# Altium PCB PCB.PcbDoc
Units mm, origin at the board's own origin, x right, y up, seen from the top; angles counter-clockwise.
Board outline 66.8 x 59.82 mm, 2 copper layers (Top Layer, Bottom Layer); 19 components, 17 nets, 137 pads, 32 vias.
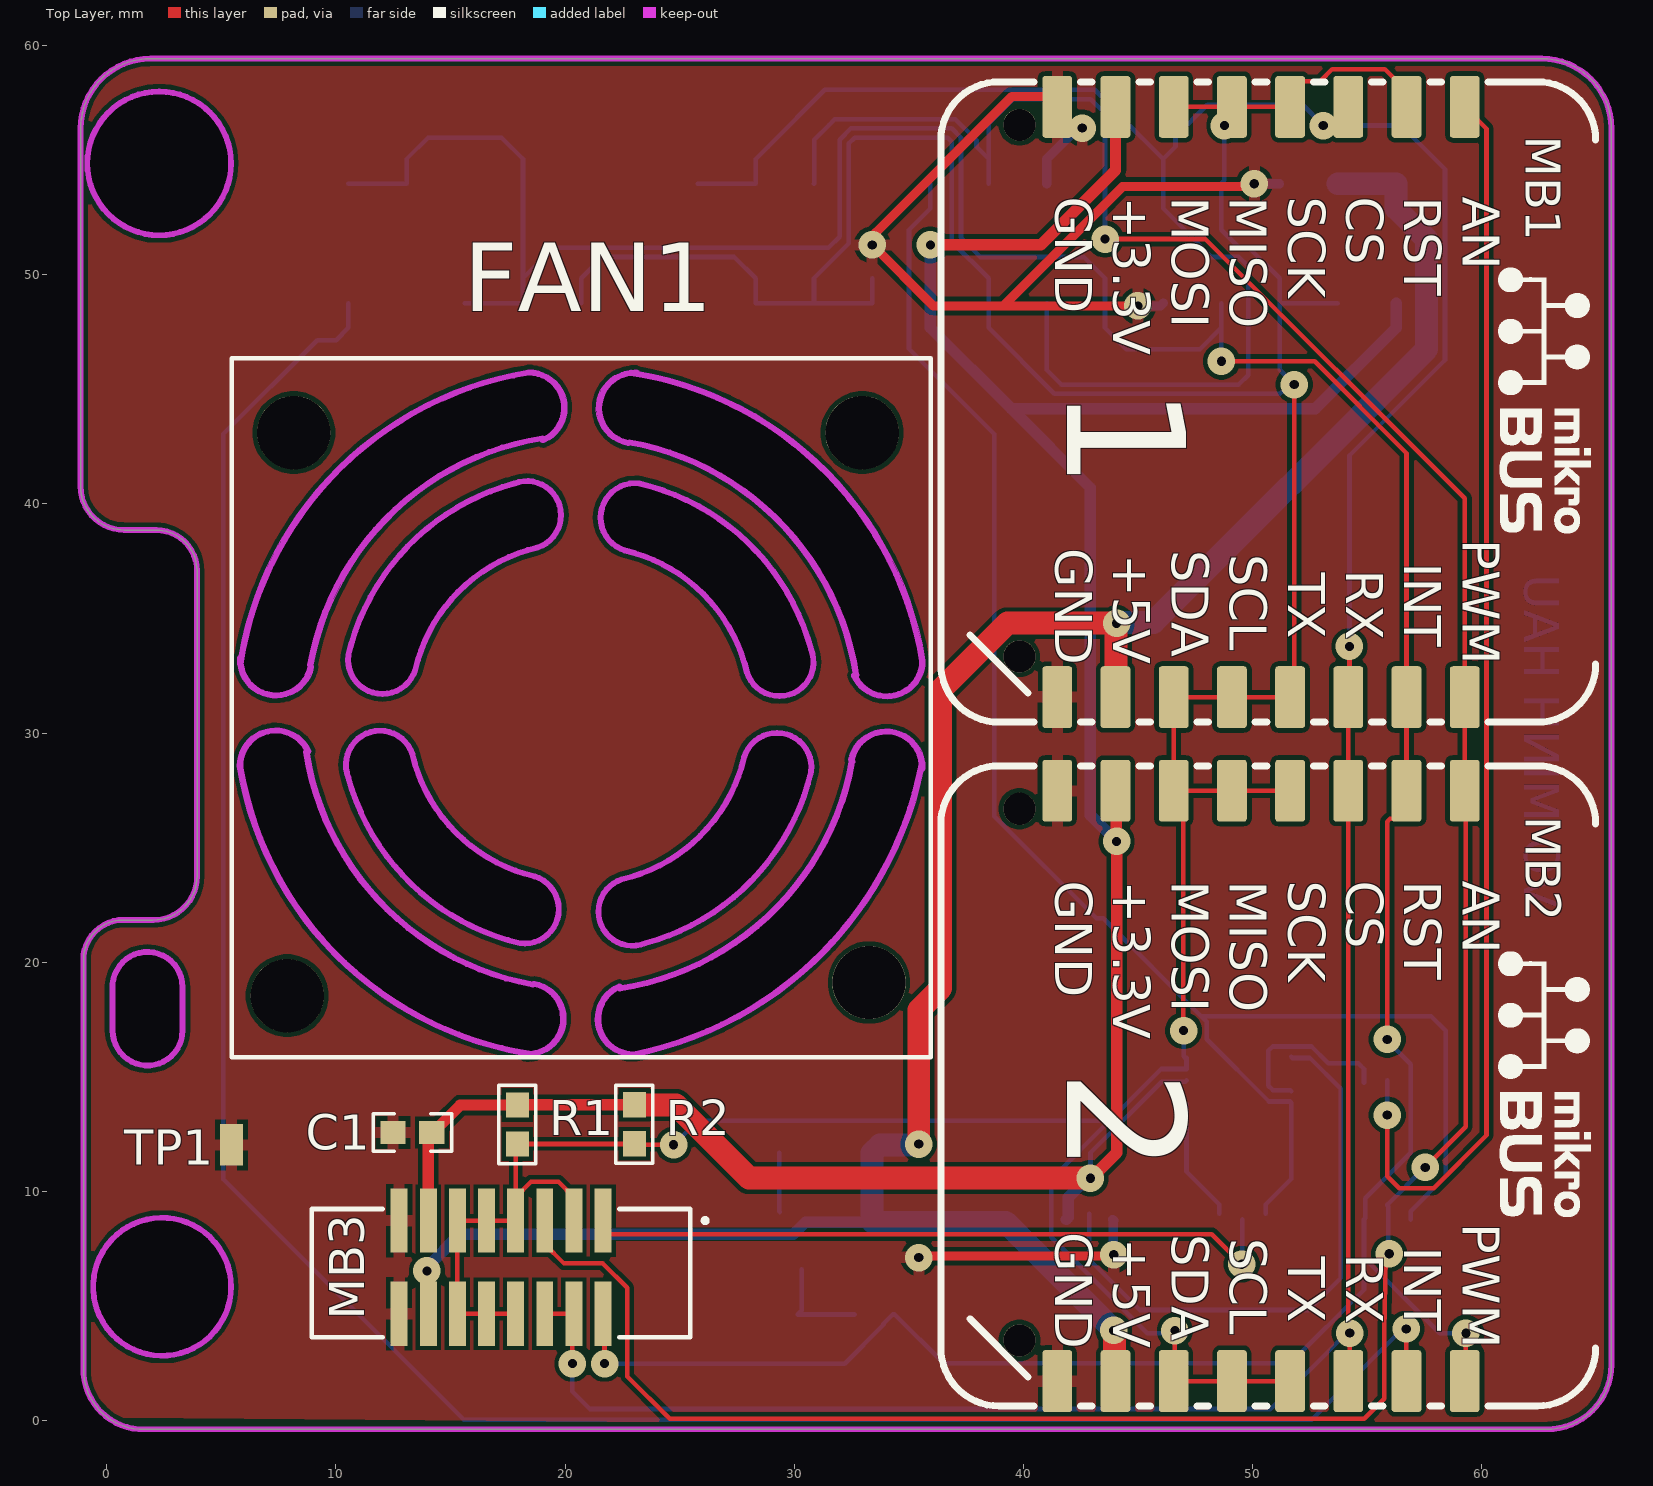
[diagram p0: Top Layer view]
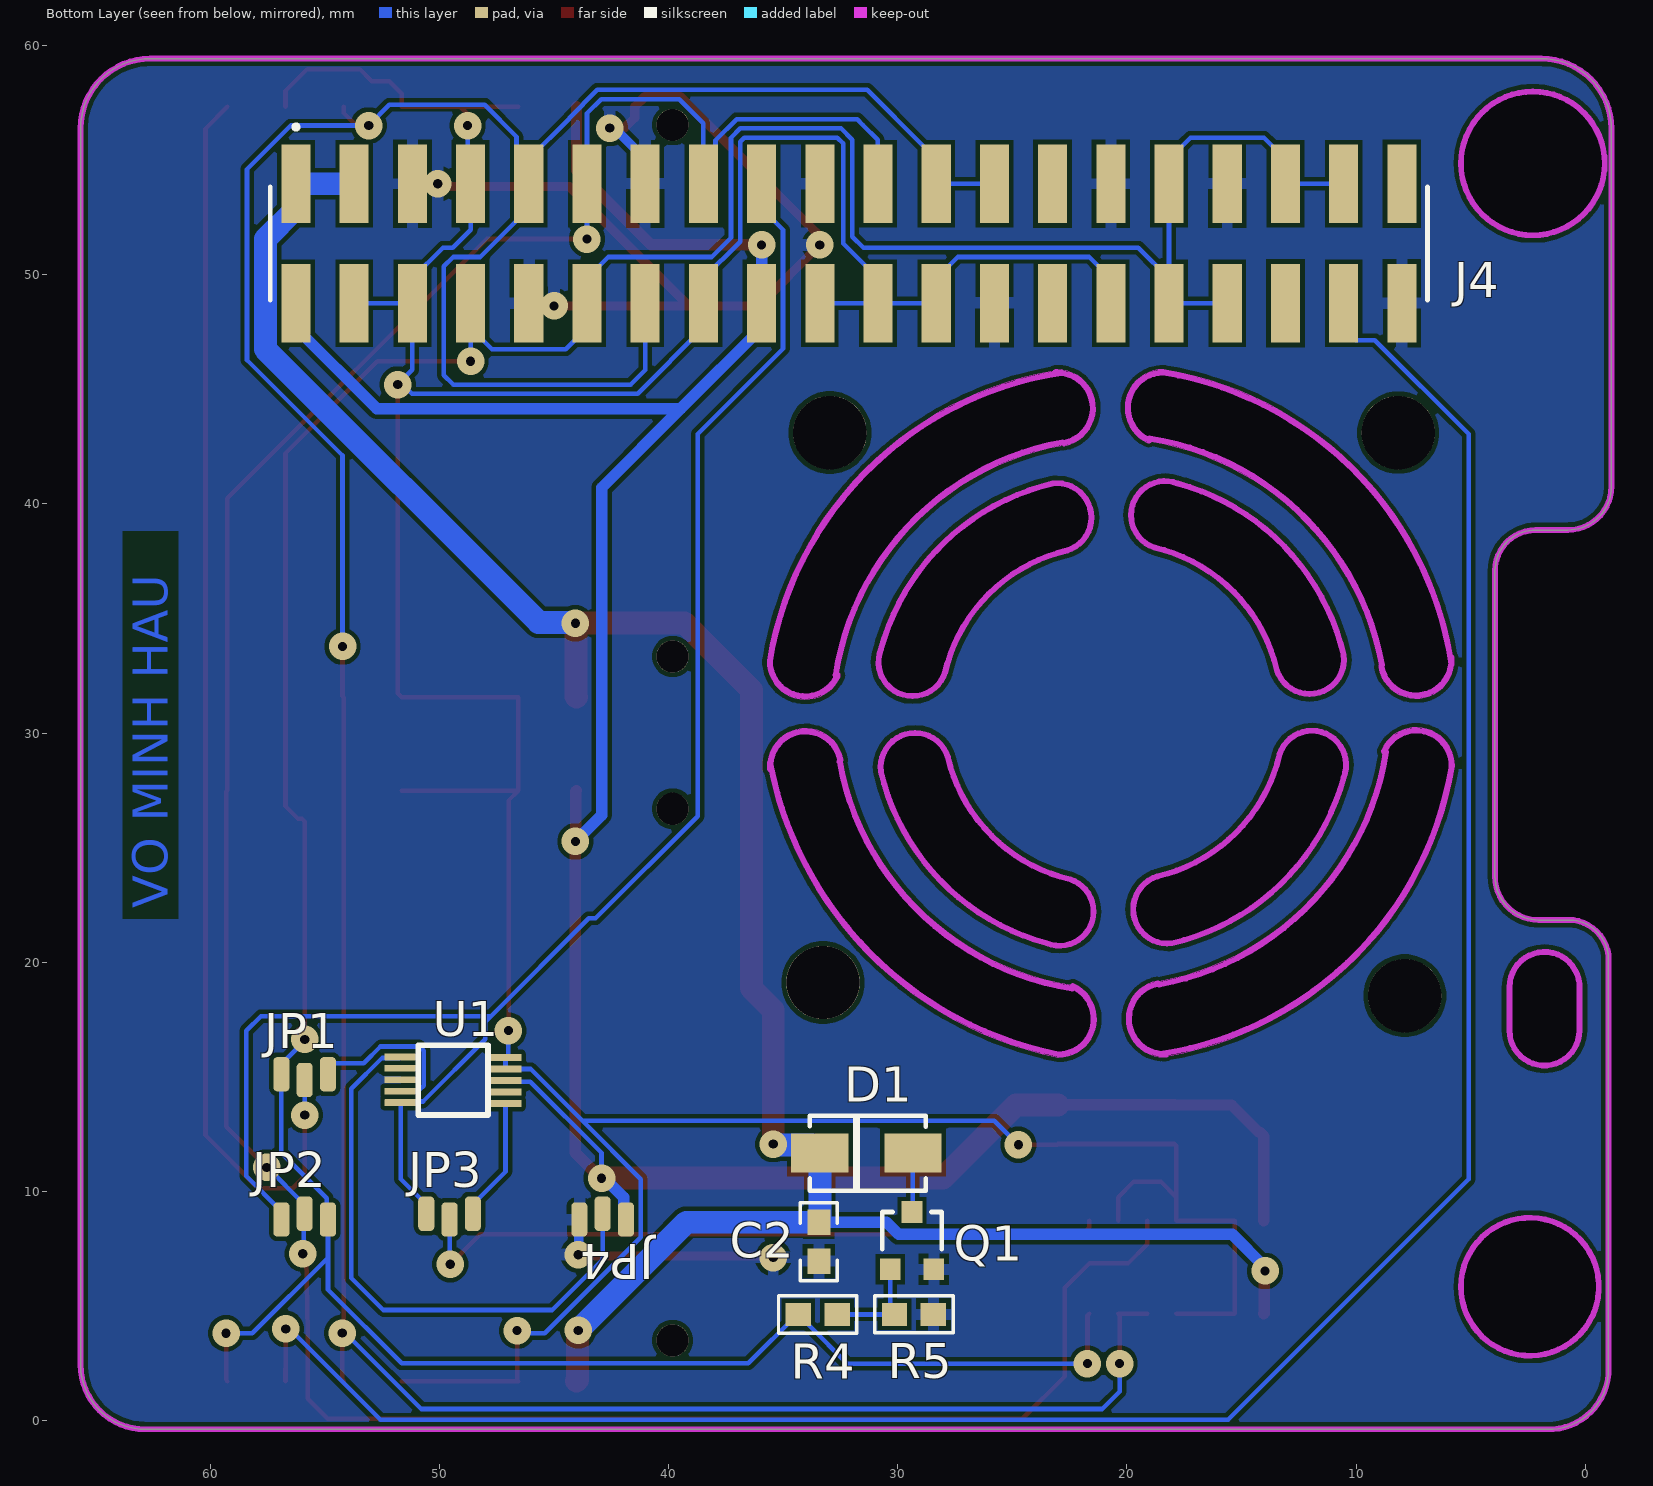
[diagram p1: Bottom Layer view, seen from below]
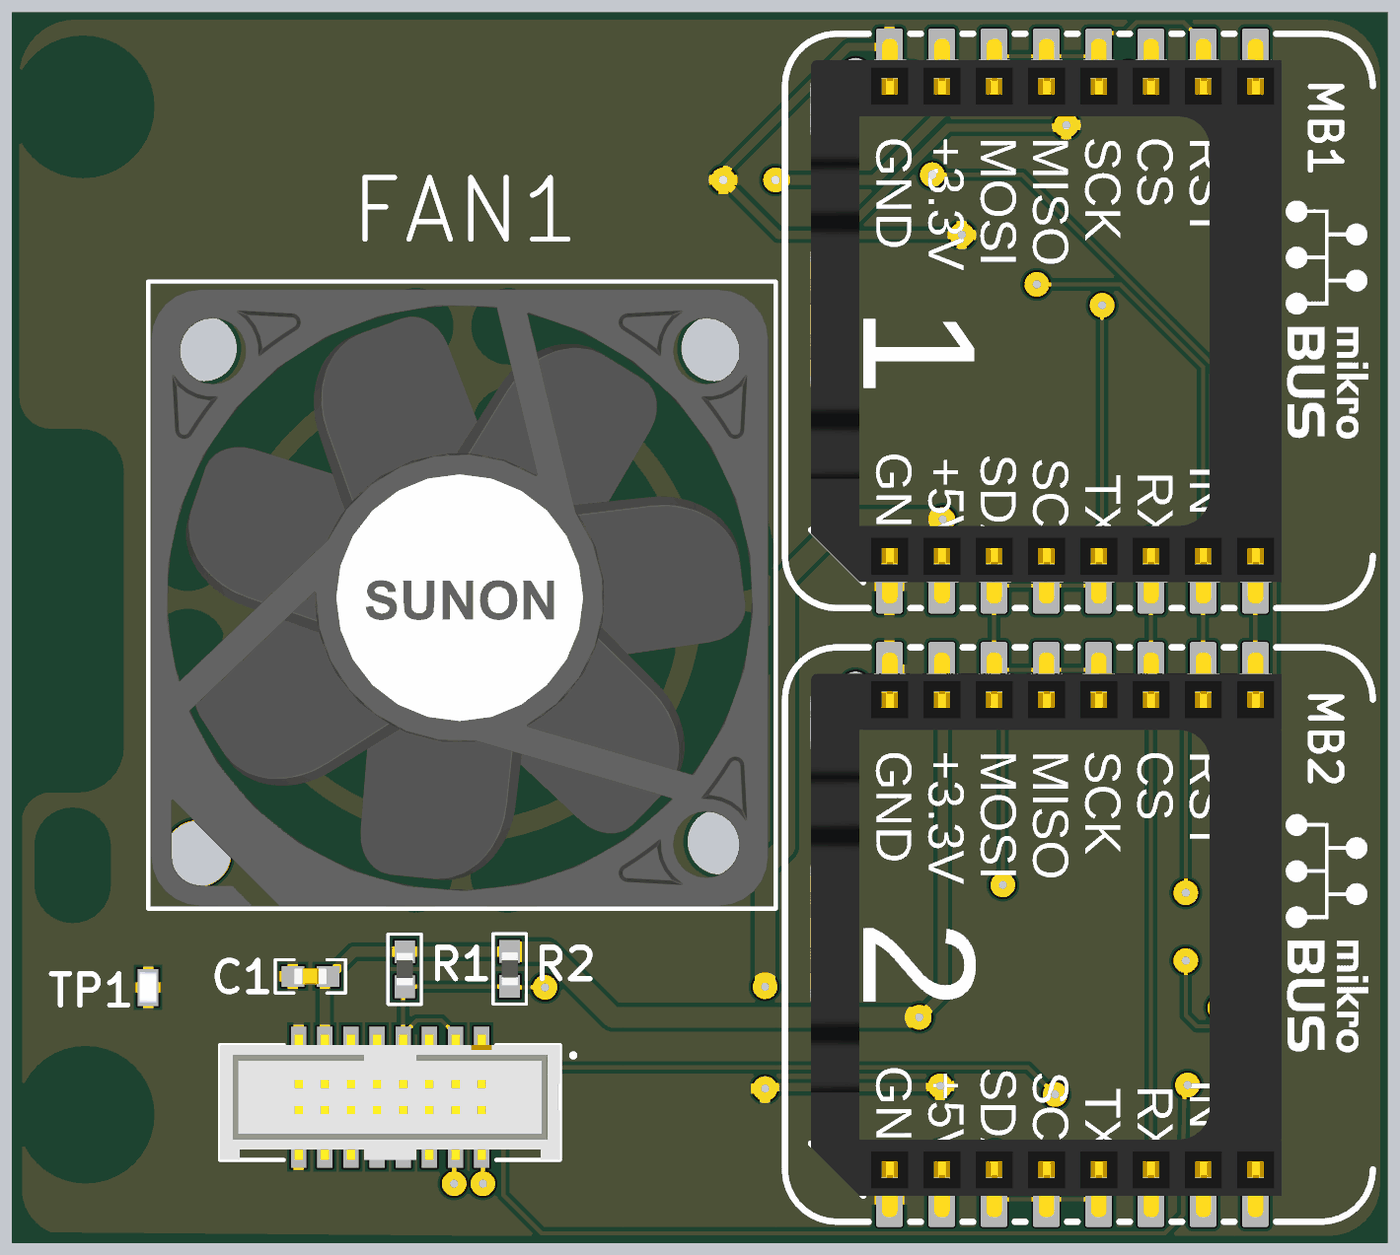
[diagram p2: 3D render of the assembled board from above, using the file's embedded part models]
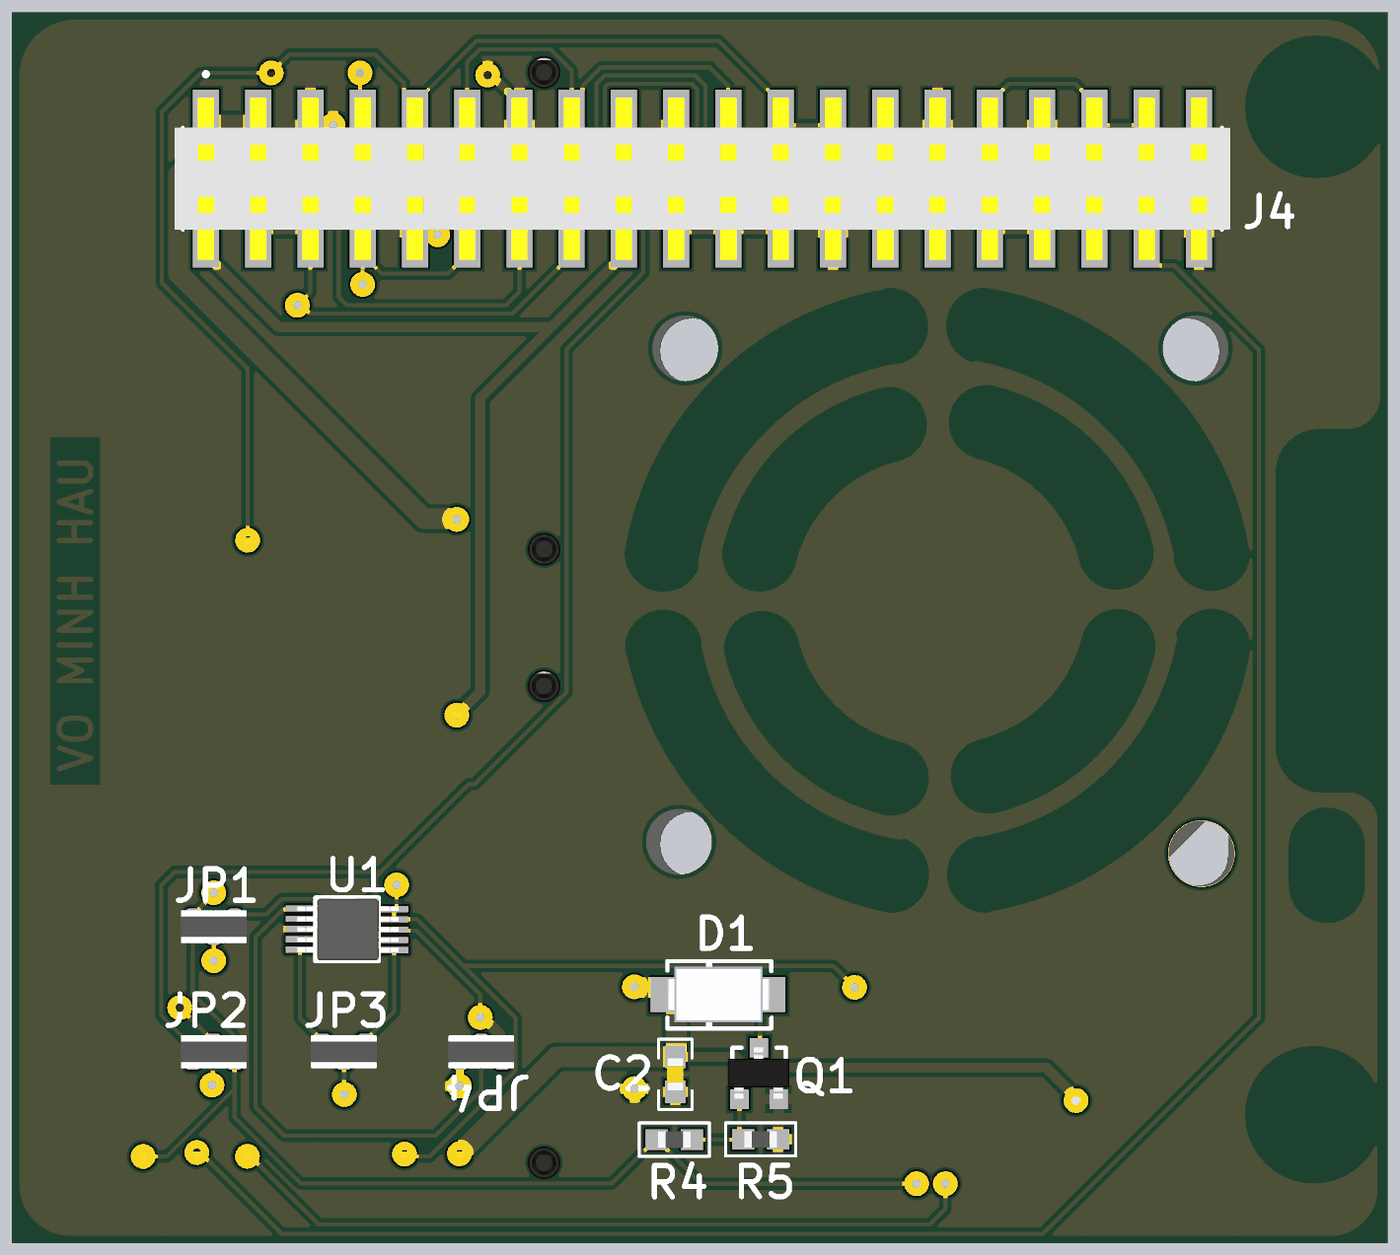
[diagram p3: 3D render of the assembled board from below, using the file's embedded part models]

## Layer stack, top to bottom
Top Solder: solder mask 0.0102, Solder Resist, Dk 3.5
Top Layer: signal copper 0.0356
Dielectric 1: dielectric 0.32, FR-4, Dk 4.8
Bottom Layer: signal copper 0.0356
Bottom Solder: solder mask 0.0102, Solder Resist, Dk 3.5

## Board outline
1.397,-0.381 cw(c1.606,2.241) -1.016,2.032 -1.016,20.32 cw(c0.762,20.066) 0.508,21.844 2.032,21.844 ccw(c2.032,23.749) 3.937,23.749 3.937,37.084 ccw(c2.159,37.084) 2.159,38.862 0.762,38.862 cw(c0.762,40.767) -1.143,40.767 -1.143,56.388 cw(c1.905,56.388) 1.905,59.436 62.624,59.436 cw(c62.624,56.401) 65.659,56.401 65.659,2.434 cw(c62.844,2.434) 62.844,-0.381
cut-out: 2.413,2.831 cw(c2.413,5.842) -0.598,5.842 cw(c2.413,5.842) 2.413,8.853 cw(c2.413,5.842) 5.424,5.842 cw(c2.413,5.842)
cut-out: 0.254,17.018 ccw(c1.778,17.018) 3.302,17.018 3.302,18.923 ccw(c1.775,18.926) 0.254,19.05
cut-out: 5.703,28.548 cw(c5.828,28.568) 5.701,28.567 cw(c7.366,28.575) 8.886,29.256 cw(c8.769,29.204) 8.897,29.204 cw(c8.769,29.204) 8.834,29.094 ccw(c20.758,31.041) 18.595,19.154 cw(c18.669,19.05) 18.694,19.175 cw(c18.37,17.54) 20.037,17.54 cw(c18.37,17.54) 18.599,15.888 cw(c18.542,16.002) 18.523,15.876 cw(c23.519,48.952) 18.509,15.878 cw(c18.37,17.539) 18.281,15.875 cw(c18.288,16.002) 18.182,15.931 cw(c20.806,31.007)
cut-out: 5.716,33.039 cw(c33.814,28.798) 5.718,33.053 cw(c7.379,33.192) 5.715,33.281 cw(c5.842,33.274) 5.771,33.38 cw(c20.847,30.756) 18.388,45.859 cw(c18.408,45.734) 18.407,45.861 cw(c18.415,44.196) 20.08,44.196 cw(c18.415,44.196) 19.096,42.676 cw(c19.044,42.793) 18.934,42.728 ccw(c20.881,30.804) 8.994,32.967 cw(c8.89,32.893) 9.017,32.893 cw(c8.89,32.893) 9.015,32.868 cw(c7.38,33.192) 5.728,32.963 cw(c5.842,33.02)
cut-out: 2.286,51.727 cw(c2.286,54.864) -0.851,54.864 cw(c2.286,54.864) 2.286,58.001 cw(c2.286,54.864) 5.423,54.864 cw(c2.286,54.864)
cut-out: 22.994,15.861 cw(c22.987,17.526) 22.306,19.046 cw(c22.358,18.929) 22.468,18.994 ccw(c20.521,30.918) 32.408,28.755 cw(c32.512,28.829) 32.387,28.854 cw(c34.022,28.53) 35.674,28.759 cw(c35.56,28.702) 35.687,28.702 cw(c35.56,28.702) 35.685,28.678 cw(c32.993,29.183) 35.684,28.67 cw(c34.023,28.53) 35.69,28.53 cw(c34.026,28.53) 35.687,28.441 cw(c35.56,28.448) 35.616,28.334 cw(c19.85,31.663) 23.019,15.863 cw(c22.994,15.988)
cut-out: 23.495,20.828 cw(c22.942,22.209) 22.479,23.622 ccw(c20.86,30.575) 27.813,28.956 cw(c29.246,28.512) 30.734,28.321 cw(c20.834,30.642)
cut-out: 18.034,20.828 cw(c20.355,30.728) 10.541,28.067 cw(c11.922,28.62) 13.335,29.083 ccw(c20.288,30.702) 18.669,23.749 cw(c18.225,22.316)
cut-out: 10.541,33.401 ccw(c12.029,33.21) 13.462,32.766 cw(c20.415,31.147) 18.796,38.1 ccw(c18.333,39.513) 17.78,40.894 ccw(c20.441,31.08)
cut-out: 27.94,32.639 ccw(c20.987,31.02) 22.606,37.973 cw(c23.05,39.406) 23.241,40.894 cw(c20.92,30.994) 30.734,33.655 cw(c29.353,33.102)
cut-out: 22.708,42.547 cw(c23.032,44.182) 22.803,45.834 cw(c22.86,45.72) 22.879,45.846 cw(c21.048,33.692) 22.893,45.844 cw(c23.032,44.183) 23.121,45.847 cw(c23.114,45.72) 23.22,45.791 cw(c20.596,30.715) 35.699,33.174 cw(c35.574,33.154) 35.701,33.155 cw(c19.03,33.082) 35.701,33.154 35.701,33.155 cw(c33.951,33.147) 35.701,33.147 cw(c34.036,33.147) 32.516,32.466 cw(c32.633,32.518) 32.568,32.628 ccw(c20.644,30.681) 22.807,42.568 cw(c22.733,42.672)

## Design rules (kind name [scope] priority, off if disabled: settings)
Clearance [All] p1: gap=0.2 ignorepadtopadclearanceinfootprint=FALSE
PolygonConnect [All] p1: connectstyle=Relief reliefconductorwidth=0.5 reliefentries=4 polygonreliefangle="90 Angle" airgapwidth=0.2
RoutingVias [All] p1: holewidth=0.4 width=1.2 viastyle="Through Hole" minholewidth=0.4 minwidth=1.2 maxholewidth=0.4 maxwidth=1.2
SolderMaskExpansion [All] p1: expansion=0.102 istentingtop=FALSE
Width [All] p1: maxlimit=1 minlimit=0.2 preferedwidth=0.5
30 further rules are at their usual default settings.

## Classes and differential pairs
component class NGUYENLY: C1 C2 D1 FAN1 JP1 JP2 JP3 JP4 MB1 MB2 MB3 Q1 R1 R2 R4 R5 TP1 U1

## Components (designator, comment, footprint, x,y, rotation, side; value= is the part's Value field where it differs from the comment)
C1 "0.1uF" "CAPC-0603 (1608)" 13.335,12.573 r0 top value=NF
C2 "0.1uF" "CAPC-0603 (1608)" 33.444,7.806 r90 bottom value=NF
D1 "Diode Zener 3v3 1.5w" DIODE_DO214AC_SMA 31.369,11.684 r0 bottom
FAN1 "MF30101V1-1000U-A99" Sunon_Fans_0_MFG 20.701,31.115 r0 top
J4 "SSW-120-22-X-D-VS" SAMTEC_SSW-120-22-X-D-VS 32.131,51.37 r180 bottom
JP1 "JP1" PCB 54.864,15.115 r0 bottom
JP2 "JP2" PCB 56.896,8.775 r180 bottom
JP3 "JP3" PCB 48.543,9.029 r0 bottom
JP4 "JP4" PCB 43.895,8.775 r180 bottom
MB1 "MIKROBUS HOST CONN TH 16" "MIKROBUS HOST SMD 16 - Black" 49.53,44.45 r270 top
MB2 "MIKROBUS HOST CONN TH 16" "MIKROBUS HOST SMD 16 - Black" 49.53,14.605 r270 top
MB3 "SHF-108-01-L-D-SM" SAMTEC_SHF-108-01-L-D-SM 17.206,6.694 r180 top
Q1 "DMG3420U-7" SOT23-123 29.376,7.852 r180 bottom
R1 "10K" "RESC-0603 (1608)" 17.918,12.922 r90 top value=NF
R2 "10K" "RESC-0603 (1608)" 23.022,12.933 r90 top value=NF
R4 "100" "RESC-0603 (1608)" 33.493,4.631 r0 bottom value=NF
R5 "100K" "RESC-0603 (1608)" 29.297,4.639 r180 bottom value=NF
TP1 "S2761-46R" HARWIN_S2761-46R 5.443,12.033 r270 top
U1 "ADS1115IDGSG" ADS1115IDGSR 51.689,15.875 r180 bottom

## Footprints (in the part's own frame and the unit in brackets; to place one, negate y for a bottom-side part, rotate by r counter-clockwise, add the part's x,y. Pads: shape width x height; smd on the part's side, far side on the other; paste and mask are expansions set on the pad)
ADS1115IDGSR [mm]
  rrect10% 1.4x0.3 smd: 1(0,0) 2(0,-0.5) 3(0,-1) 4(0,-1.5) 5(0,-2) 6(4.572,-2.032) 7(4.572,-1.532) 8(4.572,-1.032) 9(4.572,-0.532) 10(4.572,-0.032)
  round 1 on Bottom Overlay: ""(1.397,-0.127)
  silkscreen extent 0.76,-2.54 3.81,0.51, body extent -0.13,-2.52 4.8,0.48, height 1.01
"CAPC-0603 (1608)" [mm] "Resistor, Chip; 1.60 mm L X 0.80 mm W X 0.50 mm H body"
  rect 1.1x1 smd mask+0.1: 1(-0.85,0) 2(0.85,0)
  silkscreen extent -1.71,-0.81 1.71,0.81, body extent -0.8,-0.4 0.8,0.4, height 0.6
DIODE_DO214AC_SMA [mm] "Diode 2214AC- SMA type"
  rect 2.5x1.7 smd: 1(-2.032,0) 2(2.032,0)
  silkscreen extent -2.59,-1.63 2.46,1.7, body extent -2.53,-1.35 2.47,1.35, height 2.25
HARWIN_S2761-46R [mm]
  rect 1.8x1 smd: 1(0,0)
  body extent -0.8,-0.4 0.8,0.4, height 1.18
"MIKROBUS HOST SMD 16 - Black" [mm]
  round 1.4 hole 1.4 unplated: 0(-12.094,-9.703) 0(11.106,-9.703)
  rrect20% 2.7x1.3 smd mask+0.076: 1(-12.88,9.728) 2(-12.88,7.188) 3(-12.88,4.648) 4(-12.88,2.108) 5(-12.88,-0.432) 6(-12.88,-2.972) 7(-12.88,-5.512) 8(-12.88,-8.052) 9(12.88,-8.052) 10(12.88,-5.512) 11(12.88,-2.972) 12(12.88,-0.432) 13(12.88,2.108) 14(12.88,4.648) 15(12.88,7.188) 16(12.88,9.728)
  silkscreen extent -13.97,-13.13 13.97,15.44, body extent -13.72,-11.88 13.74,11.02, height 11.01
PCB [mm]
  rrect50% 0.7x1.5 smd: 1(0,0) 2(1.016,0.254) 3(2.032,0)
  body extent -0.58,-0.67 2.62,0.93, height 0.54
"RESC-0603 (1608)" [mm] "Resistor, Chip; 1.60 mm L X 0.80 mm W X 0.50 mm H body"
  rect 1.1x1 smd mask+0.1: 1(-0.85,0) 2(0.85,0)
  silkscreen extent -1.71,-0.81 1.71,0.81, body extent -0.8,-0.4 0.8,0.4, height 0.5
SAMTEC_SHF-108-01-L-D-SM [mm]
  rect 0.74x2.795 smd: 01(-4.445,-2.033) 02(-4.445,2.033) 03(-3.175,-2.033) 04(-3.175,2.033) 05(-1.905,-2.033) 06(-1.905,2.033) 07(-0.635,-2.033) 08(-0.635,2.033) 09(0.635,-2.033) 10(0.635,2.033) 11(1.905,-2.033) 12(1.905,2.033) 13(3.175,-2.033) 14(3.175,2.033) 15(4.445,-2.033) 16(4.445,2.033)
  silkscreen extent -9.01,-2.54 8.25,3.05, body extent -8.25,-3.05 8.25,3.05, height 5.47
SAMTEC_SSW-120-22-X-D-VS [mm]
  rect 1.27x3.43 smd: 01(-24.13,2.605) 02(-24.13,-2.605) 03(-21.59,2.605) 04(-21.59,-2.605) 05(-19.05,2.605) 06(-19.05,-2.605) 07(-16.51,2.605) 08(-16.51,-2.605) 09(-13.97,2.605) 10(-13.97,-2.605) 11(-11.43,2.605) 12(-11.43,-2.605) 13(-8.89,2.605) 14(-8.89,-2.605) 15(-6.35,2.605) 16(-6.35,-2.605) 17(-3.81,2.605) 18(-3.81,-2.605) 19(-1.27,2.605) 20(-1.27,-2.605) 21(1.27,2.605) 22(1.27,-2.605) 23(3.81,2.605) 24(3.81,-2.605) 25(6.35,2.605) 26(6.35,-2.605) 27(8.89,2.605) 28(8.89,-2.605) 29(11.43,2.605) 30(11.43,-2.605) 31(13.97,2.605) 32(13.97,-2.605) 33(16.51,2.605) 34(16.51,-2.605) 35(19.05,2.605) 36(19.05,-2.605) 37(21.59,2.605) 38(21.59,-2.605) 39(24.13,2.605) 40(24.13,-2.605)
  silkscreen extent -25.25,-2.47 25.25,5.18, body extent -25.65,-3.94 25.65,3.94, height 9.76
SOT23-123 [mm] "SOT23, 1=bottom-left, 2=top, 3=bottom-right"
  rect 0.9x0.95 smd: 1(-0.95,-1.25) 2(0,1.25)
  rect 0.9x0.95 smd mask+0: 3(0.95,-1.25)
  silkscreen extent -1.3,-0.38 1.3,1.25, body extent -1.52,-1.23 1.48,1.27, height 1.06
Sunon_Fans_0_MFG [mm]
  round 3.2 hole 3.2: ""(-12.827,-12.573)
  round 3.2 hole 3.2 unplated paste-1000 mask+0: ""(-12.54,12) ""(12.26,12) ""(12.56,-12)
  silkscreen extent -15.25,-15.25 15.25,15.25, body extent -15.46,-15.48 15.24,15.22, height 0.25

## Part data
C1 C2: library part "CAPC NF 0603", "CAP SMD, Not Fill, 0603", Category=CAPACITOR, Solder="Not Fill"
D1: library part "1SMA5913BT3G; BZG05C3V3TR", "DIODE ZENER 3.3V 1.5W SMA, DO-214AC", MPN=1SMA5913BT3G, CompanyID=VT-00944, Solder=SMT
J4: "40 Position Receptacle Connector Surface Mount", Package=None, Availability=Bad, MF=Samtec, MP=SSW-120-22-G-D-VS, Price=None
JP1 JP2 JP3 JP4: library part JP
MB1 MB2: library part "MIKROBUS HOST CONN"
MB3: Package=None, Availability=Unavailable, MF=Samtec, MP=SHF-108-01-L-D-SM, Price=None
Q1: library part 2N7002, "N-channel Enhancement Mode Field-effect Transistor", Category=Transistor-FET, Mounting Technology="Surface Mount", Status=Unreleased, Transistor Type=NPN
R1 R2 R4 R5: library part "RESC NF 0603", "RES SMD, Not Fill, 0603", Category=RESISTOR, Solder="Not Fill"
TP1: "Natural PC Test Point Brass, Tin Plating Surface Mount Mounting Type", Package=None, Check_prices=https://www.snapeda.com/parts/S2761-46R/Harwin+Inc./view-part/?ref=eda, Digi-Key_Part_Number=952-2665-2-ND, MF="Harwin Inc.", MP=S2761-46R, Purchase-URL=https://pricing.snapeda.com/search/part/S2761-46R/?ref=eda, SnapEDA_Link=https://www.snapeda.com/parts/S2761-46R/Harwin+Inc./view-part/?ref=snap

## Via types
v1: diameter 1.2, hole 0.4, Top Layer to Bottom Layer, 32 vias

## Nets (pads, with @x,y where several pads share a name; then routed paths per layer and width w, separated by ;. In a path a pad name is that pad's centre, name@x,y a point inside that pad or via, vN(x,y) a via of type N, cw(c..) or ccw(c..) an arc to the next point about the centre after c; other vN are vias at no path point)
3V3: C1.2 J4.02 J4.18 JP4.3 MB1.7 MB2.7 MB3.13 R1.2 R2.2 U1.8 | length 121.8
  Top Layer w0.5: MB3.13 14.031,12.419 C1.2 14.235,12.573 15.434,13.772 R1.2 17.924,13.778 R2.2@23.016,13.778 ; v1(35.941,51.308) 40.767,51.308 44.018,54.559 MB1.7 ; v1(42.926,10.579) 42.964,10.579 44.069,11.684 v1(44.069,25.273) 44.044,25.298 44.044,27.46 MB2.7
  Top Layer w1: R2.2@23.016,13.778 24.83,13.778 28.029,10.579 v1(42.926,10.579)
  Bottom Layer w0.2: v1(42.926,10.579) 42.926,11.684 46.035,14.793 47.067,14.793 U1.8
  Bottom Layer w0.5: v1(35.941,51.308) J4.18 35.941,47.685 39.464,44.162 ; JP4.3 41.956,8.868 41.956,9.74 42.795,10.579 v1(42.926,10.579) ; v1(44.069,25.273) 42.926,26.416 42.926,40.7 39.464,44.162 ; J4.02 56.261,47.685 52.738,44.162 39.464,44.162
5V: C2.2 D1.2 J4.01 J4.03 MB1.10 MB2.10 MB3.14 | length 103.4
  Top Layer w0.5: v1(13.97,6.529) 14.001,6.499 14.001,4.693 MB3.14
  Top Layer w1: v1(35.433,12.065) 35.433,17.91 36.39,18.867 36.39,31.887 39.301,34.798 v1(44.069,34.798) ; v1(43.942,3.937) 43.98,3.899 43.98,1.763 MB2.10 ; v1@44.015,34.744 44.044,34.716 44.044,31.595 MB1.10
  Bottom Layer w0.5: v1(13.97,6.529) 13.97,6.695 15.403,8.128 29.963,8.128 30.491,8.656 C2.2
  Bottom Layer w1: v1(35.433,12.065) 35.395,12.027 33.744,12.027 D1.2 33.401,8.749 33.444,8.706 C2.2 39.223,8.656 v1(43.942,3.937) ; v1(44.069,34.798) 44.107,34.836 45.672,34.836 57.596,46.76 57.596,51.56 56.261,52.895 J4.01 J4.03
ADC0: JP1.1 U1.4 | length 7.9
  Bottom Layer w0.2: U1.4 51.639,14.425 50.874,14.425 50.689,14.61 50.689,16.14 50.874,16.325 52.57,16.325 53.305,15.59 54.62,15.59 54.864,15.346 JP1.1 JP1.1@54.864,14.756
ADC1: J4.17 JP2.1 JP3.3 U1.5 | length 73.2
  Bottom Layer w0.2: J4.17 35.941,52.895 35.006,51.96 35.006,46.782 38.735,43.053 38.735,26.377 43.191,21.921 43.484,21.921 47.752,17.653 ; JP3.3 50.575,9.429 51.689,10.544 U1.5 51.639,13.925 50.718,13.925 48.006,16.637 48.006,17.399 47.752,17.653 ; JP2.1 56.896,9.138 58.432,10.675 58.432,17.006 57.785,17.653 47.752,17.653
ADC2: JP3.1 U1.6 | length 5.4
  Bottom Layer w0.2: U1.6 47.117,10.855 48.543,9.429 JP3.1
ADDR: JP4.2 U1.1 | length 25.5
  Bottom Layer w0.2: JP4.2 42.879,7.032 45.085,4.826 52.451,4.826 53.848,6.223 53.848,14.481 52.504,15.825 51.739,15.825 U1.1
AN1: JP1.2 MB1.1 | length 55
  Top Layer w0.2: v1(55.88,13.335) 55.88,10.668 56.4,10.148 57.905,10.148 60.208,12.451 60.208,56.38 MB1.1
  Bottom Layer w0.2: v1(55.88,13.335) JP1.2
AN2: J4.11 J4.15 J4.21 JP2.2 MB1.16 MB2.1 MB3.05 | length 129.4
  Top Layer w0.2: MB3.05 19.111,7.699 19.953,6.858 21.647,6.858 22.714,5.791 22.714,1.924 24.563,0.075 54.876,0.075 55.753,0.952 55.753,3.794 55.753,3.877 55.818,7.137 55.877,7.196 v1(55.965,7.284) ; v1(43.561,51.562) 47.939,51.562 59.258,40.243 MB1.16 MB2.1 59.308,27.435 59.308,12.823 v1(57.532,11.048)
  Bottom Layer w0.2: J4.21 30.873,53.987 30.873,55.892 31.536,56.554 31.771,56.79 37.032,56.79 37.952,55.87 37.952,55.584 J4.15@38.481,55.055 ; J4.15 J4.15@38.481,55.055 ; v1(43.561,51.562) J4.11 43.561,57.049 42.941,57.669 39.538,57.669 38.481,56.612 J4.15@38.481,55.055 ; v1(55.965,7.284) 55.922,7.326 55.922,9.356 55.88,9.398 55.88,9.429 55.897,9.429 57.515,11.048 v1(57.532,11.048)
AN3: JP3.2 MB3.01 | length 31.1
  Top Layer w0.2: MB3.01 21.651,8.41 21.921,8.14 48.215,8.14 v1(49.53,6.825) v1@49.293,6.825
  Bottom Layer w0.2: v1(49.53,6.825) 49.544,6.839 49.544,8.761 JP3.2
GND: C1.1 C2.1 J4.05 J4.10 J4.13 J4.19 J4.26 J4.29 J4.33 J4.40 JP4.1 MB1.8 MB1.9 MB2.8 MB2.9 MB3.15 MB3.16 Q1.3 R5.2 TP1.1 U1.3 | length 54.4
  Top Layer w0.4: v1(35.433,7.112) 35.497,7.176 43.879,7.176 v1(43.943,7.24) ; v1(42.568,56.406) 41.928,56.406 41.478,56.856 41.478,57.335 41.028,57.785 39.497,57.785 33.554,51.842 33.554,51.461 v1(33.401,51.308) 36.068,48.641 39.116,48.641 ; v1(44.996,48.641) 39.116,48.641 ; v1(50.076,53.975) 49.949,53.848 44.323,53.848 39.116,48.641
  Bottom Layer w0.4: J4.13 41.021,55.055 42.372,56.406 v1(42.568,56.406) ; JP4.1 43.942,8.728 43.919,8.705 43.919,7.265 v1(43.943,7.24) ; v1(44.996,48.641) 45.977,48.641 J4.10 ; v1(50.076,53.975) J4.05
GPIO2/I2C-SDA: J4.04 J4.06 J4.07 J4.16 J4.20 J4.22 J4.24 J4.30 MB1.2 MB1.4 MB1.5 MB1.6 MB1.11 MB1.12 MB1.13 MB2.4 MB2.5 MB2.6 MB2.11 MB2.12 MB2.13 MB3.03 MB3.07 MB3.08 MB3.09 MB3.10 MB3.11 MB3.12 R1.1 R2.1 U1.9 U1.10 | length 189.4
  Top Layer w0.2: MB3.08 MB3.10 MB3.12 MB3.11 MB3.09 MB3.07 MB3.07@17.841,9.754 ; MB3.03 20.381,9.754 19.711,10.424 18.511,10.424 MB3.07@17.841,9.754 ; v1(24.735,12.035) 23.047,12.035 23.01,12.072 R1.1 17.841,11.995 MB3.07@17.841,9.754 ; MB1.6 MB1.5 ; v1(46.609,3.926) 46.609,1.776 MB2.11 MB2.12 MB2.13 ; v1(46.99,17.018) 46.984,17.024 46.984,27.059 MB2.6 ; v1(48.768,56.515) 48.768,57 MB1.5 ; MB2.4 MB2.5 MB2.6 ; v1(51.816,45.212) 51.816,31.748 MB1.13 MB1.12 MB1.11 MB2.6 ; MB1.2 56.718,58.03 55.768,58.98 53.48,58.98 52.95,58.45 52.186,58.45 51.638,57.902 MB1.4 MB1.5
  Bottom Layer w0.2: J4.30 20.701,49.845 21.636,50.78 27.386,50.78 28.321,49.845 J4.24 J4.22 ; v1(24.735,12.035) 25.781,13.081 43.757,13.081 ; J4.20@33.401,49.845 J4.20 J4.22 ; v1(46.609,3.926) 46.493,3.81 45.406,3.81 41.213,8.003 41.213,10.537 43.757,13.081 ; v1(46.99,17.018) 46.99,15.893 47.04,15.843 U1.10 U1.9 46.019,15.343 43.757,13.081 ; v1(48.768,56.515) 48.768,54.102 J4.07 48.641,51.96 49.421,51.18 49.846,51.18 51.181,49.845 J4.06 ; J4.04 J4.06 ; J4.22 30.861,49.845 32.385,51.369 32.385,55.733 32.642,55.99 36.7,55.99 36.876,55.814 36.876,51.45 38.481,49.845 38.481,47.685 41.354,44.812 51.199,44.812 51.599,45.212 v1(51.816,45.212) 51.816,45.215 51.181,45.85 J4.06
GPIO4: J4.08 J4.12 J4.31 J4.32 J4.34 J4.35 J4.37 JP1.3 JP2.3 MB1.15 MB2.2 MB2.16 MB3.02 R4.2 | length 159
  Top Layer w0.2: MB3.02 21.72,4.593 v1(21.72,2.486) ; v1(48.641,46.228) 52.708,46.228 56.718,42.218 MB1.15 56.718,26.806 56.17,26.258 55.997,26.258 55.88,26.141 v1(55.88,16.637) ; MB2.16 59.309,1.776 v1(59.309,3.81)
  Bottom Layer w0.2: J4.37 J4.35 13.081,55.055 14.016,55.99 17.226,55.99 18.161,55.055 J4.31 J4.32@18.161,49.845 ; J4.34 J4.32 J4.32@18.161,49.845 ; v1(21.72,2.486) 32.197,2.486 33.893,4.181 33.893,4.231 34.293,4.631 R4.2 ; R4.2@34.393,4.631 36.525,2.499 51.648,2.499 54.864,5.715 54.864,7.112 ; v1(48.641,46.228) J4.08@48.641,47.685 ; J4.08 J4.08@48.641,47.685 ; v1(55.88,16.637) 55.88,16.572 56.896,15.556 56.896,13.659 56.907,13.648 56.907,11.695 54.92,9.708 54.92,8.831 JP2.3 54.864,8.255 54.864,7.112 ; v1(59.309,3.81) 58.166,3.81 54.864,7.112 ; J4.32@18.161,49.845 19.497,51.181 31.496,51.181 31.98,51.665 31.98,55.894 32.476,56.39 36.866,56.39 37.276,55.98 37.276,51.624 38.12,50.78 42.626,50.78 43.561,49.845 43.561,47.685 44.496,46.75 47.706,46.75 J4.08@48.641,47.685
GPIO7/CS1: J4.09 J4.14 J4.23 J4.25 MB1.3 MB1.14 MB2.3 MB2.14 MB3.04 MB3.06 | length 158.9
  Top Layer w0.2: MB3.06 MB3.04 20.32,4.601 v1(20.32,2.486) ; v1(53.088,56.515) 53.63,56.515 54.178,57.063 MB1.3 ; MB2.14 54.243,1.79 v1(54.243,3.821) ; v1@54.178,3.886 MB2.3 MB1.14 54.229,31.621 v1(54.229,33.782)
  Bottom Layer w0.2: v1(20.32,2.486) 20.32,1.27 21.082,0.508 50.8,0.508 54.113,3.821 v1(54.243,3.821) ; J4.25 J4.23 28.321,55.055 28.856,55.59 31.335,58.069 43.107,58.069 44.336,56.839 44.336,56.82 J4.09@46.101,55.055 ; J4.14 41.021,45.847 41.656,45.212 49.403,45.212 49.806,45.615 49.806,50.374 49.4,50.78 48.216,50.78 46.101,52.895 J4.09 J4.09@46.101,55.055 ; v1(54.229,33.782) 54.229,42.116 58.396,46.283 58.396,54.614 56.495,56.515 v1(53.088,56.515) 52.188,57.415 48.017,57.415 46.636,56.034 46.636,55.59 J4.09@46.101,55.055
GPIO26: J4.38 MB2.15 | length 100.9
  Top Layer w0.2: v1(56.704,3.999) 56.704,2.945 MB2.15
  Bottom Layer w0.2: J4.38 10.541,47.685 10.006,47.15 9.177,47.15 5.08,43.053 5.08,10.541 15.575,0.046 52.578,0.046 56.531,3.999 v1(56.704,3.999)
NetD1_1: D1.1 Q1.2 | length 2.6
  Bottom Layer w0.2: D1.1 29.337,9.141 Q1.2
NetQ1_1: Q1.1 R4.1 R5.1 | length 4.5
  Bottom Layer w0.2: Q1.1 30.326,4.818 R5.1 30.154,4.631 R4.1
SPIO25/DRDY: U1.2
pads on no net: FAN1. J4.27 J4.28 J4.36 J4.39 MB1.0 MB2.0 U1. U1.7

## Polygon pours and split planes (outlines as drawn)
GND on Top Layer "GND_L01_P001" (solid, pour order 1): 0,0.127 0,0.635 -0.889,1.524 -0.889,20.955 0,21.844 2.413,21.844 3.175,22.606 3.683,22.606 3.683,22.987 3.81,23.114 3.683,23.241 3.683,37.973 2.794,38.862 0,38.862 -1.143,40.005 -1.143,57.277 -0.762,57.658 -0.762,58.166 0.508,59.436 2.159,59.436 2.286,59.563 63.373,59.563 63.881,59.055 64.389,59.055 65.278,58.166 65.278,57.658 65.659,57.277 65.659,1.397 64.897,0.635 64.897,0.381 64.516,0 64.008,0 63.627,-0.381 63.5,-0.381
GND on Bottom Layer "GND_L02_P006" (solid, pour order 6): -1.016,1.397 -0.762,1.143 -0.762,1.016 -0.508,0.762 -0.508,0.508 0,0 0.254,0 0.508,-0.254 0.889,-0.254 1.016,-0.381 63.373,-0.381 63.373,-0.254 63.754,-0.254 64.008,0 64.262,0 64.77,0.508 64.897,0.508 65.278,0.889 65.278,1.143 65.532,1.397 65.532,1.778 65.659,1.905 65.659,56.896 65.532,57.023 65.532,57.404 65.405,57.531 65.405,57.785 65.024,58.166 65.024,58.293 64.389,58.928 64.262,58.928 64.008,59.182 63.627,59.182 63.5,59.309 62.992,59.309 62.865,59.436 1.397,59.436 1.27,59.309 0.762,59.309 0.508,59.055 0.381,59.055 -0.254,58.42 -0.381,58.42 -0.381,58.293 -0.889,57.785 -0.889,57.531 -1.016,57.404 -1.016,57.15 -1.143,57.023 -1.143,40.132 -0.889,39.878 -0.889,39.751 -0.254,39.116 -0.127,39.116 0.127,38.862 2.413,38.862 2.54,38.735 2.921,38.735 3.81,37.846 3.81,37.465 3.937,37.338 3.937,23.368 3.81,23.241 3.81,22.987 3.556,22.733 3.556,22.606 3.048,22.098 2.921,22.098 2.794,21.971 2.286,21.971 2.159,21.844 0.127,21.844 -0.254,21.463 -0.381,21.463 -0.762,21.082 -0.762,20.828 -1.016,20.574

## Keep-outs
Keep-Out Layer:
  circle w0.254: c2.413,5.842 r3.011
  circle w0.254: c2.286,54.864 r3.137
  lines w0.254: 5.842,33.02 cw(c20.847,30.756) 18.408,45.734 cw(c18.415,44.196) 19.044,42.793 ; 5.842,33.274 ccw(c7.38,33.192) 8.89,32.893 ; 8.692,29.179 ccw(c20.758,31.041) 18.591,19.025 ; 8.769,29.204 ccw(c7.366,28.575) 5.828,28.568 ccw(c20.806,31.007) 18.542,16.002 ; 8.865,32.971 cw(c20.881,30.804) 19.019,42.87 ; 18.288,16.002 ccw(c18.37,17.54) 18.669,19.05 ; 22.358,18.929 ccw(c22.987,17.526) 22.994,15.988 ccw(c19.85,31.663) 35.56,28.702 ; 22.383,18.852 ccw(c20.521,30.918) 32.537,28.751 ; 22.733,42.672 cw(c23.032,44.182) 23.114,45.72 ; 22.811,42.697 cw(c20.644,30.681) 32.71,32.543 ; 22.86,45.72 cw(c20.596,30.715) 35.574,33.154 cw(c34.036,33.147) 32.633,32.518 ; 32.512,28.829 cw(c34.022,28.53) 35.56,28.448 ; -1.143,40.767 ccw(c0.762,40.767) 0.762,38.862 2.159,38.862 cw(c2.159,37.084) 3.937,37.084 3.937,23.749 cw(c2.032,23.749) 2.032,21.844 0.508,21.844 ccw(c0.762,20.066) -1.016,20.32 -1.016,2.032 ccw(c1.606,2.241) 1.397,-0.381 62.844,-0.381 ccw(c62.844,2.434) 65.659,2.434 65.659,56.401 ccw(c62.624,56.401) 62.624,59.436 1.905,59.436 ccw(c1.905,56.388) -1.143,56.388 -1.143,40.767 ; 0.254,17.018 ccw(c1.778,17.018) 3.302,17.018 3.302,18.923 ccw(c1.775,18.926) 0.254,19.05 0.254,17.018 ; 10.541,28.067 cw(c11.922,28.62) 13.335,29.083 ccw(c20.288,30.702) 18.669,23.749 cw(c18.225,22.316) 18.034,20.828 cw(c20.355,30.728) 10.541,28.067 ; 10.541,33.401 ccw(c12.029,33.21) 13.462,32.766 cw(c20.415,31.147) 18.796,38.1 ccw(c18.333,39.513) 17.78,40.894 ccw(c20.441,31.08) 10.541,33.401 ; 22.479,23.622 ccw(c22.942,22.209) 23.495,20.828 ccw(c20.834,30.642) 30.734,28.321 ccw(c29.246,28.512) 27.813,28.956 cw(c20.86,30.575) 22.479,23.622 ; 22.606,37.973 cw(c23.05,39.406) 23.241,40.894 cw(c20.92,30.994) 30.734,33.655 cw(c29.353,33.102) 27.94,32.639 ccw(c20.987,31.02) 22.606,37.973

## Other copper
Bottom Layer:
  text "VO MINH HAU" at 61.849,22.352 h1.52 r270

## Text inside footprints (layer, text, board x,y; h text height)
MB1: Top Overlay "1" at 40.208,45.155 h8.89 r270; Top Overlay "SDA" at 45.923,37.987 h2.79 r270; Top Overlay "RST" at 56.083,53.401 h2.79 r270; Top Overlay "CS" at 53.543,53.403 h2.79 r270; Top Overlay "MISO" at 48.463,53.403 h2.79 r270; Top Overlay "SCK" at 51.003,53.403 h2.79 r270; Top Overlay "MOSI" at 45.923,53.403 h2.79 r270; Top Overlay "+3.3V" at 43.383,53.401 h2.79 r270; Top Overlay "GND" at 40.843,53.403 h2.79 r270; Top Overlay "SCL" at 48.463,37.801 h2.79 r270; Top Overlay "INT" at 56.083,37.434 h2.79 r270; Top Overlay "RX" at 53.543,37.126 h2.79 r270; Top Overlay "TX" at 51.003,36.994 h2.79 r270; Top Overlay "GND" at 40.843,38.075 h2.79 r270; Top Overlay "+5V" at 43.383,37.811 h2.79 r270; Top Overlay "AN" at 58.623,53.401 h2.79 r270; Top Overlay "PWM" at 58.623,38.466 h2.79 r270
MB2: Top Overlay "PWM" at 58.623,8.621 h2.79 r270; Top Overlay "AN" at 58.623,23.556 h2.79 r270; Top Overlay "+5V" at 43.383,7.966 h2.79 r270; Top Overlay "GND" at 40.843,8.23 h2.79 r270; Top Overlay "TX" at 51.003,7.149 h2.79 r270; Top Overlay "RX" at 53.543,7.281 h2.79 r270; Top Overlay "INT" at 56.083,7.589 h2.79 r270; Top Overlay "SCL" at 48.463,7.956 h2.79 r270; Top Overlay "GND" at 40.843,23.558 h2.79 r270; Top Overlay "+3.3V" at 43.383,23.556 h2.79 r270; Top Overlay "MOSI" at 45.923,23.558 h2.79 r270; Top Overlay "SCK" at 51.003,23.558 h2.79 r270; Top Overlay "MISO" at 48.463,23.558 h2.79 r270; Top Overlay "CS" at 53.543,23.558 h2.79 r270; Top Overlay "RST" at 56.083,23.556 h2.79 r270; Top Overlay "SDA" at 45.923,8.142 h2.79 r270; Top Overlay "2" at 40.208,15.31 h8.89 r270